# Altium PCB PCB2.PcbDoc
Units mil, origin at the board's own origin, x right, y up, seen from the top; angles counter-clockwise.
Board outline 6155 x 4050 mil, 2 copper layers (Top Layer, Bottom Layer); 71 components, 65 nets, 207 pads, 52 vias.
Unrouted connection lines stored in the file: 1.
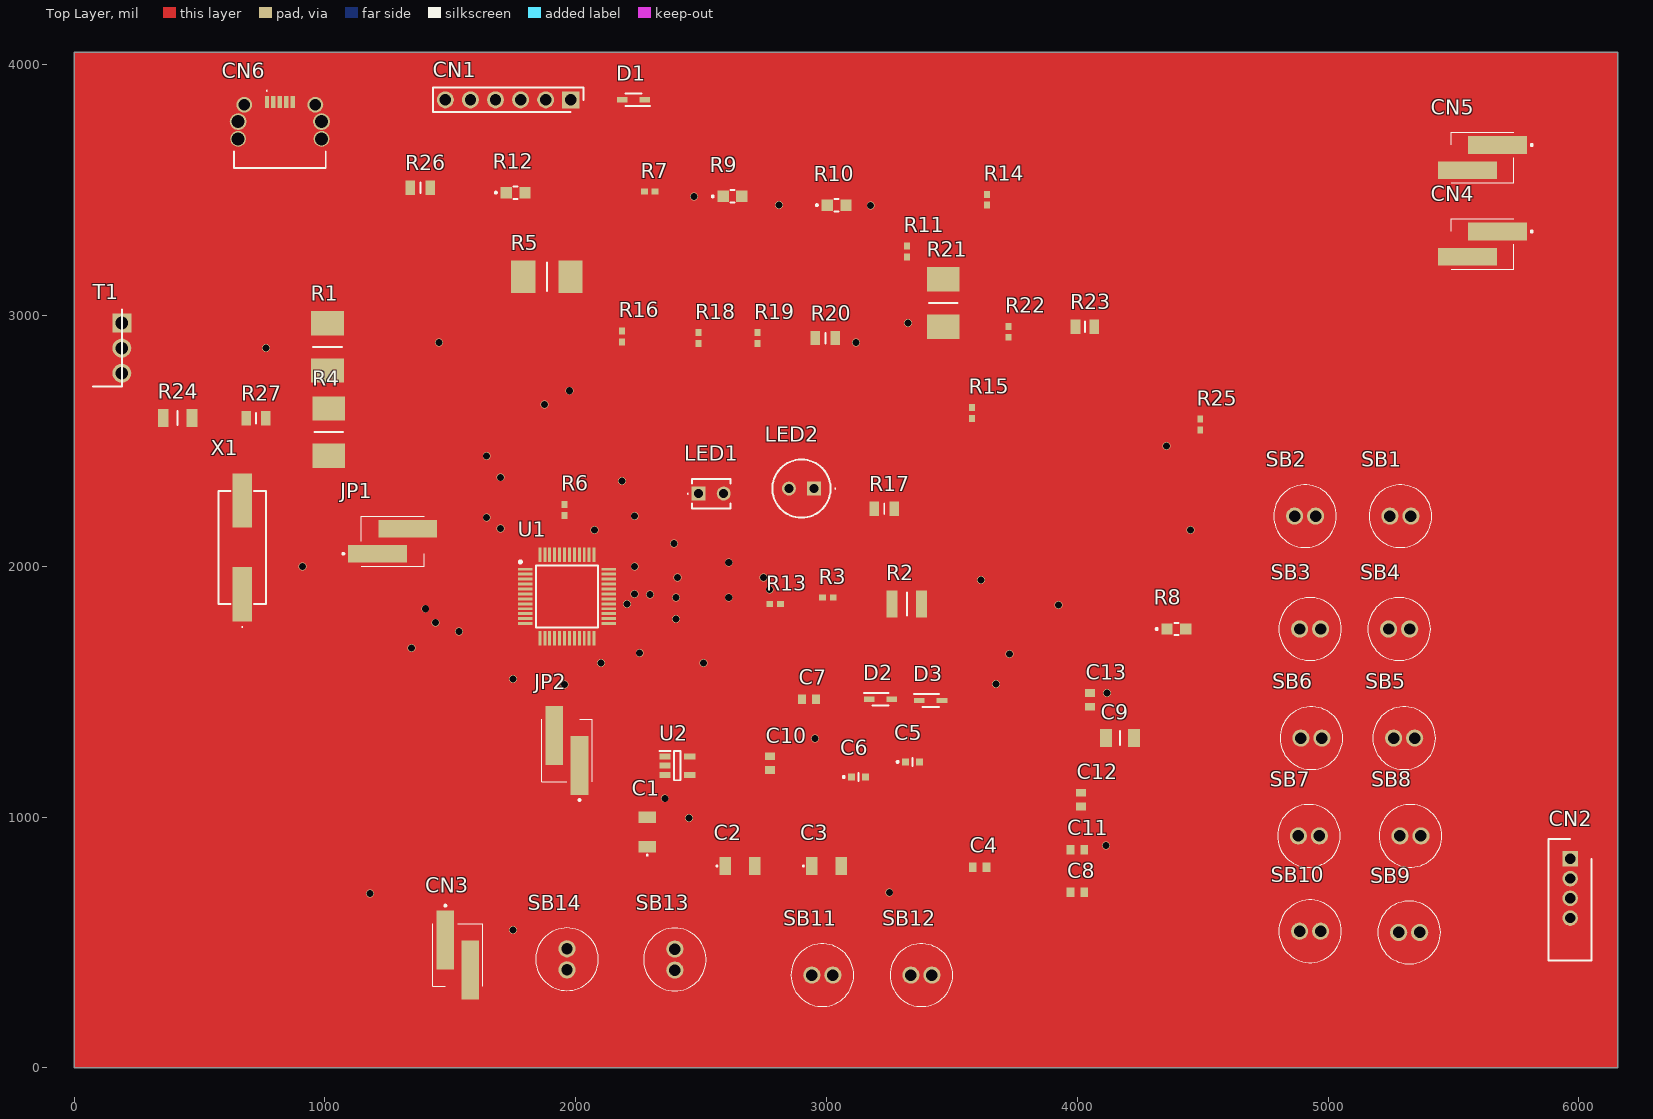
[diagram p0: Top Layer view]
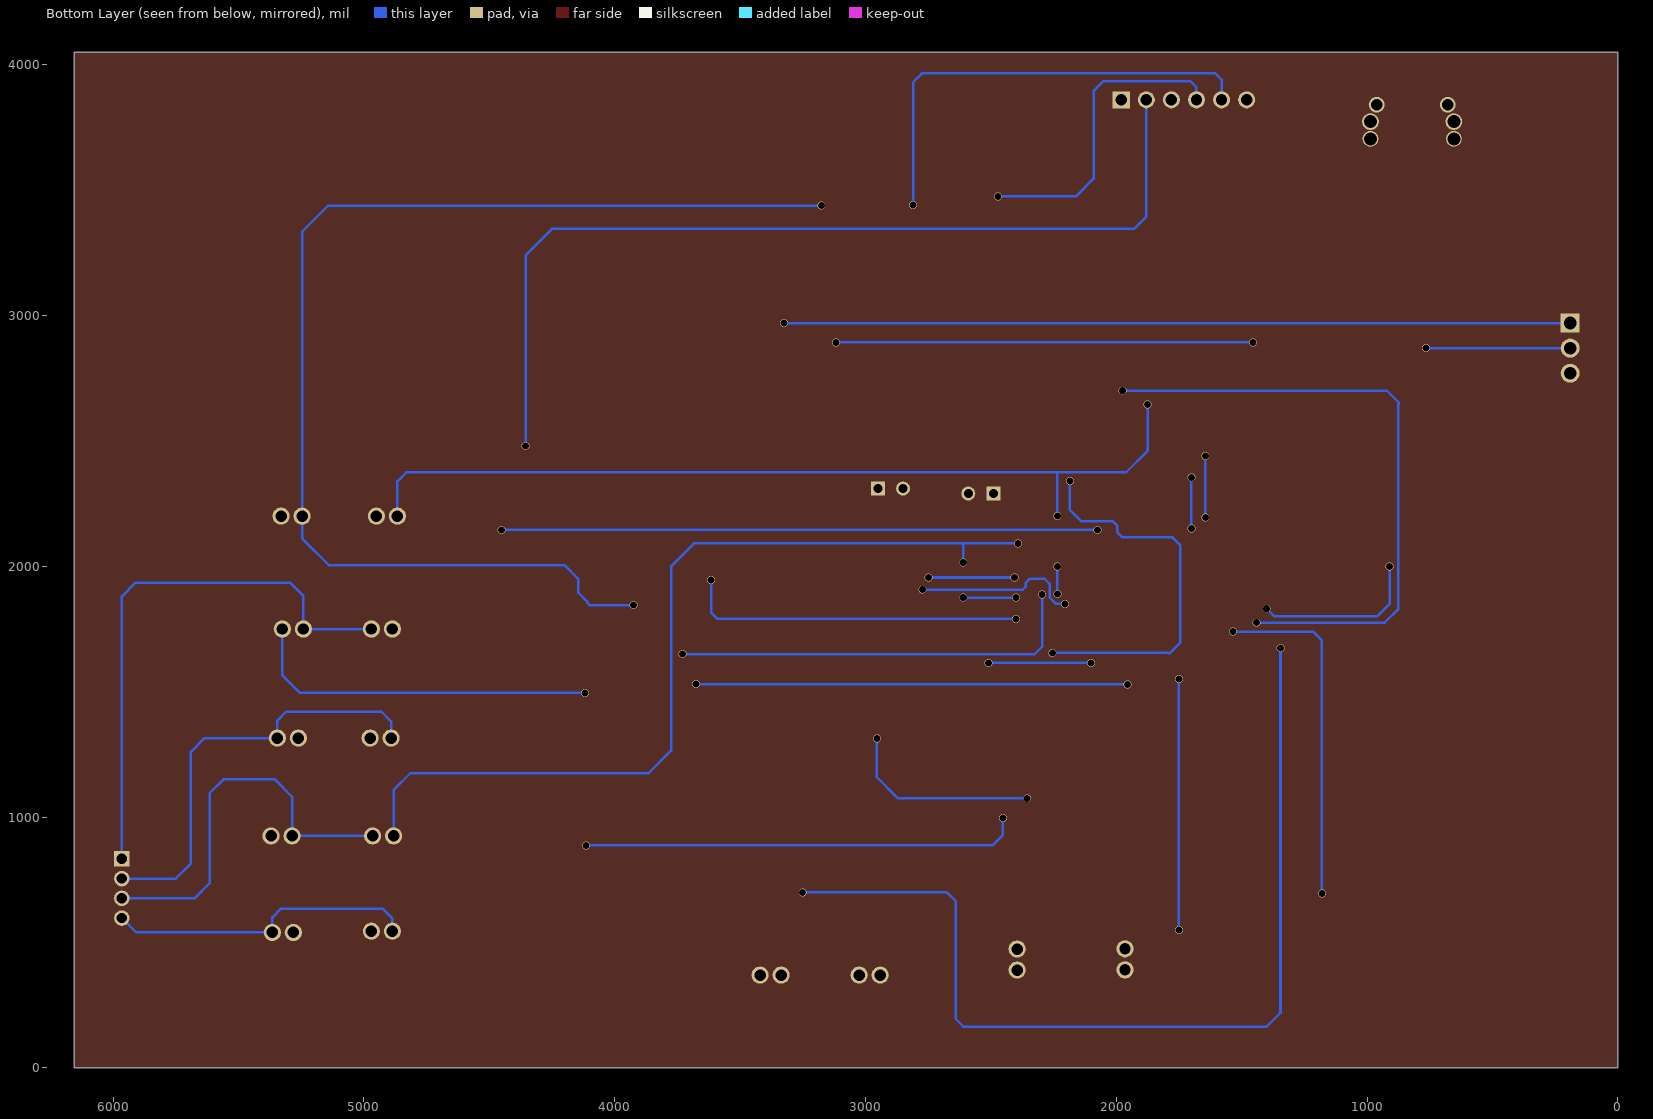
[diagram p1: Bottom Layer view, seen from below]
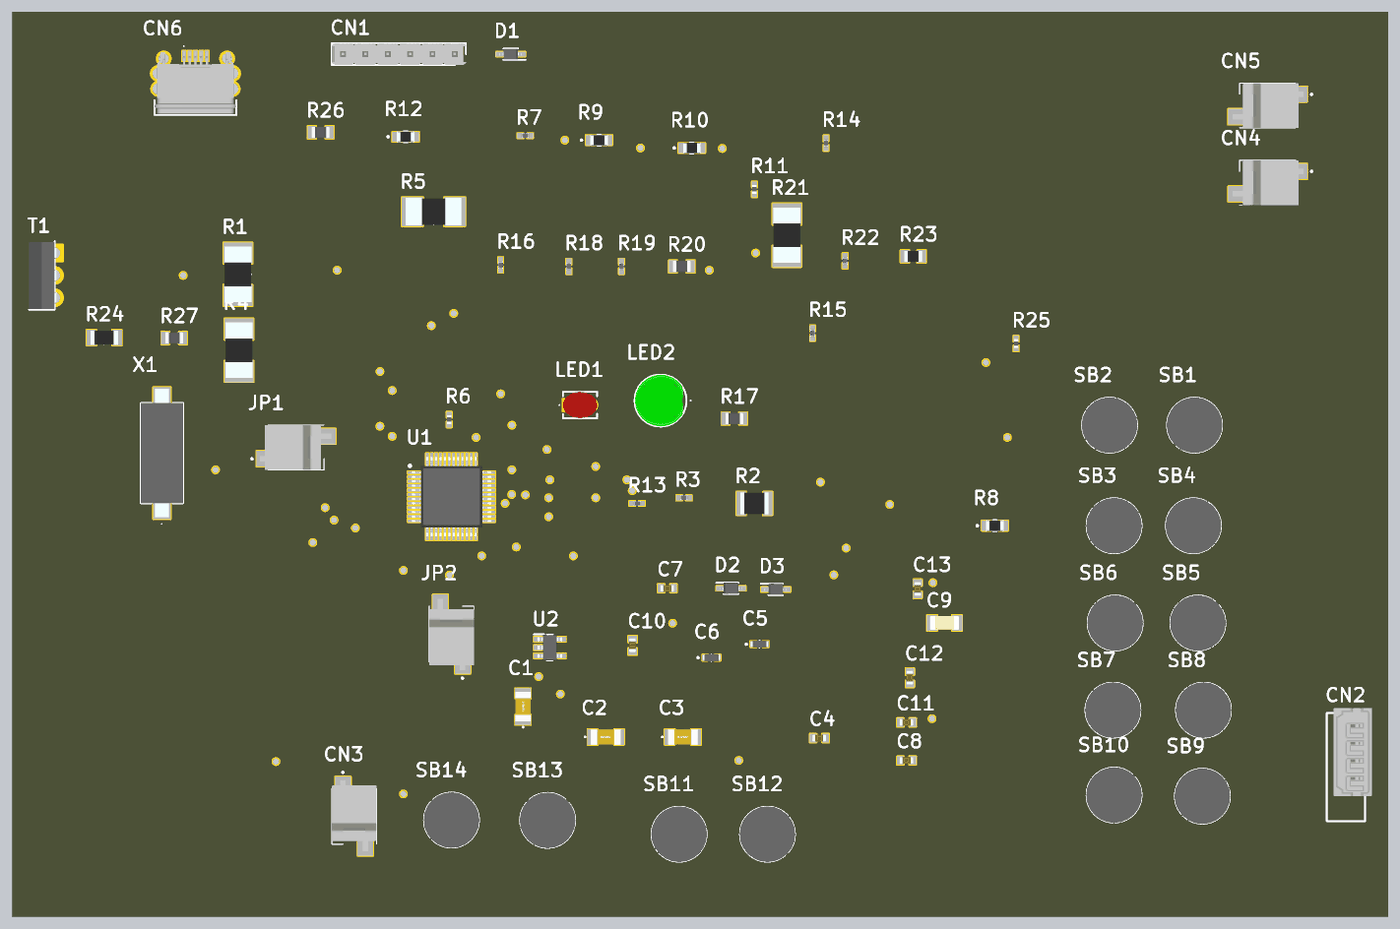
[diagram p2: 3D render of the assembled board from above, using the file's embedded part models]

## Layer stack, top to bottom
Top Solder: solder mask 0.4, Solder Resist, Dk 3.5
Top Layer: signal copper 1.4
Dielectric 1: dielectric 12.6, FR-4, Dk 4.8
Bottom Layer: signal copper 1.4
Bottom Solder: solder mask 0.4, Solder Resist, Dk 3.5

## Board outline
0,0 0,4050 6155,4050 6155,0

## Design rules (kind name [scope] priority, off if disabled: settings)
Clearance [All] p1: gap=10 ignorepadtopadclearanceinfootprint=FALSE
PolygonConnect [All] p1: connectstyle=Relief reliefconductorwidth=10 reliefentries=4 polygonreliefangle="90 Angle" airgapwidth=10
RoutingVias [All] p1: holewidth=28 width=50 viastyle="Through Hole" minholewidth=28 minwidth=50 maxholewidth=28 maxwidth=50
SolderMaskExpansion [All] p1: expansion=4 istentingtop=FALSE
Width [All] p1: maxlimit=10 minlimit=10 preferedwidth=10
30 further rules are at their usual default settings.

## Components (designator, comment, footprint, x,y, rotation, side; value= is the part's Value field where it differs from the comment)
C1 "20pF" C1206 2285,940.94 r90 top
C2 "20pF" C1206 2655,805 r0 top
C3 "20pF" C1206 3000,805 r0 top
C4 "100nF" CAPC1608X90N 3610,800 r0 top
C5 "1uF_X5R_0603" MAJx16 3342.56,1220 r0 top
C6 "1uF_X5R_0603" MAJx16 3127.56,1160 r0 top
C7 "100nF" CAPC1608X90N 2930,1470 r0 top
C8 "100nF" CAPC1608X90N 4000,700 r0 top
C9 "10nF_X7R_0603" CAPC3316X145N 4170,1315 r0 top
C10 "100nF" CAPC1608X90N 2775,1215 r90 top
C11 "100nF" CAPC1608X90N 4000,870 r0 top
C12 "100nF" CAPC1608X90N 4015,1070 r90 top
C13 "100nF" CAPC1608X90N 4050,1467.56 r90 top
CN1 "Header 6x1" HDRV6W66P0X254_1X6_1524X249X838P 1980,3860 r180 top
CN2 "53014-0410" SHDR4W60P0X200_1X4_1200X435X1000P 5965,833.74 r90 top
CN3 "3-647166-2" 36471662 1530,450.16 r180 top
CN4 "3-647166-2" 36471662 5614.84,3285 r90 top
CN5 "3-647166-2" 36471662 5614.84,3630 r90 top
CN6 "204926-1103" 2049261103 820,3725 r0 top
D1 "BAT60JFILM" SOD2513X117N 2230,3860 r180 top
D2 "BAT60JFILM" SOD2513X117N 3215,1470 r0 top
D3 "BAT60JFILM" SOD2513X117N 3415,1465 r0 top
JP1 "3-647166-2" 36471662 1270.16,2100 r270 top
JP2 "3-647166-2" 36471662 1965,1265.16 r0 top
LED1 "Red" C4SMARGYCS4V1BB1 2490,2290 r0 top
LED2 "Green" TLHG5420ASZ 2950,2310 r0 top
R1 "10K" RESC6331X80N 1010,2875 r270 top
R2 "2K7" RESC3225X70N 3320,1850 r0 top
R3 "4K7" RESC1005X37N 3005,1875 r0 top
R4 "10K" RESC6331X80N 1015,2535 r270 top
R5 "10K" RESC6331X80N 1885,3155 r180 top
R6 "100K" RESC1005X40N 1955,2225 r270 top
R7 "100" RESC1005X37N 2295,3495 r0 top
R8 "22" ERA6AEB1020V 4395,1750 r0 top
R9 "22" ERA6AEB1020V 2625,3475 r0 top
R10 "22" ERA6AEB1020V 3040,3440 r0 top
R11 "100K" RESC1005X40N 3320,3255 r90 top
R12 "22" ERA6AEB1020V 1760,3490 r0 top
R13 "100 [N/A]" RESC1005X37N 2795,1850 r0 top
R14 "4K7" RESC1005X37N 3640,3461.65 r90 top
R15 "4K7" RESC1005X37N 3580,2611.65 r90 top
R16 "100" RESC1005X37N 2185,2916.65 r90 top
R17 "0" RESC2013X84N 3230,2230 r0 top
R18 "100" RESC1005X37N 2490,2910 r90 top
R19 "100" RESC1005X37N 2725,2910 r90 top
R20 "0" RESC2013X84N 2995,2910 r0 top
R21 "10K" RESC6331X80N 3465,3050 r90 top
R22 "100" RESC1005X37N 3725,2935 r90 top
R23 "36K" RESC2012X55N 4030,2955 r180 top
R24 "1K5" RESC3116X65N 412.25,2591.32 r180 top
R25 "100K" RESC1005X40N 4490,2565 r90 top
R26 "0" RESC2013X84N 1380,3510 r0 top
R27 "0" RESC2013X84N 725,2590 r0 top
SB1 "8631CQD2" 8631CQD2 5246.14,2200 r0 top
SB2 "8631CQD2" 8631CQD2 4866.14,2200 r0 top
SB3 "8631CQD2" 8631CQD2 4886.14,1750 r0 top
SB4 "8631CQD2" 8631CQD2 5241.14,1750 r0 top
SB5 "8631CQD2" 8631CQD2 5261.14,1315 r0 top
SB6 "8631CQD2" 8631CQD2 4891.14,1315 r0 top
SB7 "8631CQD2" 8631CQD2 4881.14,925 r0 top
SB8 "8631CQD2" 8631CQD2 5286.14,925 r0 top
SB9 "8631CQD2" 8631CQD2 5281.14,540 r0 top
SB10 "8631CQD2" 8631CQD2 4886.14,545 r0 top
SB11 "8631CQD2" 8631CQD2 2941.14,370 r0 top
SB12 "8631CQD2" 8631CQD2 3336.14,370 r0 top
SB13 "8631CQD2" 8631CQD2 2395,390 r90 top
SB14 "8631CQD2" 8631CQD2 1965,475 r270 top
T1 "9013" TO254P290X760X1320-3P 190,2970 r270 top
U1 "STM32F103CBT6" QFP50P900X900X160-48N 1965,1880 r0 top
U2 "LD3985M33R" SOT95P280X145-5N 2405,1205 r0 top
X1 "8MHz(12pF)" ECS80125PXGMTR 670,2075 r90 top

## Footprints (in the part's own frame and the unit in brackets; to place one, negate y for a bottom-side part, rotate by r counter-clockwise, add the part's x,y. Pads: shape width x height; smd on the part's side, far side on the other; paste and mask are expansions set on the pad)
8631CQD2 [mm]
  round 1.74 hole 1.16: 1(0,0) 2(2.13,0)
  silkscreen extent -2.11,-3.17 4.24,3.17, body extent -2.11,-3.17 4.24,3.17, height 14.03
36471662 [mm]
  rect 1.78x5.97 smd: 1(1.27,-1.52) 2(-1.27,1.52)
  silkscreen extent -2.54,-5.1 2.54,3.18, body extent -2.54,-4.08 2.54,4, height 10.55
2049261103 [mm]
  rect 0.45x1.2 smd: 1(-1.3,3.225) 2(-0.65,3.225) 3(0,3.225) 4(0.65,3.225) 5(1.3,3.225)
  round 1.6 hole 1.17: MH1(-3.6,2.925) MH2(3.6,2.925)
  round 1.7 hole 1.3: MH3(-4.225,1.225) MH4(4.225,1.225)
  round 1.6 hole 1.3: MH5(-4.225,-0.525) MH6(4.225,-0.525)
  silkscreen extent -4.65,-3.47 4.65,4.4, body extent -4.65,-3.32 4.65,3.68, height 3.83
C4SMARGYCS4V1BB1 [mm]
  rect 1.416x1.416 hole 0.91: 1(0,0)
  round 1.416 hole 0.91: 2(2.54,0)
  silkscreen extent -1.13,-1.5 3.22,1.5, body extent -0.68,-1.5 3.22,1.5, height 10.14
C1206 [mm]
  rect 1.15x1.8 smd: 1(-1.5,0) 2(1.5,0)
  silkscreen extent -2.4,-0.05 -2.3,0.05, body extent -1.7,-0.9 1.7,0.9, height 1.75
CAPC1608X90N [mm]
  rect 0.78x0.99 smd: 1(-0.7,0) 2(0.7,0)
  body extent -0.8,-0.41 0.8,0.41, height 0.9
CAPC3316X145N [mm]
  rect 1.17x1.82 smd: 1(-1.42,0) 2(1.42,0)
  silkscreen extent 0,-0.7 0,0.7, body extent -1.65,-0.8 1.65,0.8, height 1.68
ECS80125PXGMTR [mm]
  rect 5.5x2 smd: 1(-4.75,0) 2(4.75,0)
  silkscreen extent -8.1,-2.4 5.7,2.4, body extent -7.3,-2.4 7.3,2.4, height 4.4
ERA6AEB1020V [mm]
  rect 1.15x1.15 smd: 1(-0.95,0) 2(0.95,0)
  silkscreen extent -2.1,-0.62 0.2,0.62, body extent -1,-0.63 1,0.63, height 0.5
HDRV6W66P0X254_1X6_1524X249X838P [mm]
  rect 1.725x1.725 hole 1.15: 1(0,0)
  round 1.725 hole 1.15: 2(2.54,0) 3(5.08,0) 4(7.62,0) 5(10.16,0) 6(12.7,0)
  silkscreen extent -1.27,-1.25 13.97,1.25, body extent -1.27,-1.24 13.97,1.24, height 9.65
MAJx16 [mm]
  rect 0.7x0.7 smd: 1(-0.7,0) 2(0.7,0)
  silkscreen extent -1.6,-0.4 0,0.4, body extent -0.98,-0.4 0.98,0.4, height 0.9
QFP50P900X900X160-48N [mm]
  rect 1.475x0.3 smd: 1(-4.238,2.75) 2(-4.238,2.25) 3(-4.238,1.75) 4(-4.238,1.25) 5(-4.238,0.75) 6(-4.238,0.25) 7(-4.238,-0.25) 8(-4.238,-0.75) 9(-4.238,-1.25) 10(-4.238,-1.75) 11(-4.238,-2.25) 12(-4.238,-2.75) 25(4.238,-2.75) 26(4.238,-2.25) 27(4.238,-1.75) 28(4.238,-1.25) 29(4.238,-0.75) 30(4.238,-0.25) 31(4.238,0.25) 32(4.238,0.75) 33(4.238,1.25) 34(4.238,1.75) 35(4.238,2.25) 36(4.238,2.75)
  rect 0.3x1.475 smd: 13(-2.75,-4.238) 14(-2.25,-4.238) 15(-1.75,-4.238) 16(-1.25,-4.238) 17(-0.75,-4.238) 18(-0.25,-4.238) 19(0.25,-4.238) 20(0.75,-4.238) 21(1.25,-4.238) 22(1.75,-4.238) 23(2.25,-4.238) 24(2.75,-4.238) 37(2.75,4.238) 38(2.25,4.238) 39(1.75,4.238) 40(1.25,4.238) 41(0.75,4.238) 42(0.25,4.238) 43(-0.25,4.238) 44(-0.75,4.238) 45(-1.25,4.238) 46(-1.75,4.238) 47(-2.25,4.238) 48(-2.75,4.238)
  silkscreen extent -4.85,-3.15 3.15,3.62, body extent -4.5,-4.5 4.5,4.5, height 1.6
RESC1005X37N [mm]
  rect 0.7x0.6 smd: 1(-0.55,0) 2(0.55,0)
  body extent -0.5,-0.25 0.5,0.25, height 0.32
RESC1005X40N [mm]
  rect 0.7x0.6 smd: 1(-0.55,0) 2(0.55,0)
  body extent -0.5,-0.25 0.5,0.25, height 0.4
RESC2012X55N [mm]
  rect 1x1.45 smd: 1(-0.95,0) 2(0.95,0)
  silkscreen extent 0,-0.53 0,0.53, body extent -1,-0.63 1,0.63, height 0.55
RESC2013X84N [mm]
  rect 0.95x1.45 smd: 1(-1,0) 2(1,0)
  silkscreen extent 0,-0.53 0,0.54, body extent -1.01,-0.64 1.01,0.64, height 0.36
RESC3116X65N [mm]
  rect 1.1x1.8 smd: 1(-1.45,0) 2(1.45,0)
  silkscreen extent 0,-0.7 0,0.7, body extent -1.55,-0.8 1.55,0.8, height 0.65
RESC3225X70N [mm]
  rect 1.1x2.7 smd: 1(-1.5,0) 2(1.5,0)
  silkscreen extent 0,-1.15 0,1.15, body extent -1.6,-1.25 1.6,1.25, height 0.7
RESC6331X80N [mm]
  rect 2.45x3.3 smd: 1(-2.4,0) 2(2.4,0)
  silkscreen extent 0,-1.45 0,1.45, body extent -3.15,-1.55 3.15,1.55, height 0.8
SHDR4W60P0X200_1X4_1200X435X1000P [mm]
  rect 1.575x1.575 hole 1.05: 1(0,0)
  round 1.575 hole 1.05: 2(-2,0) 3(-4,0) 4(-6,0)
  silkscreen extent -10.3,-2.18 2,2.18, body extent -7.45,-2.96 2.55,1.39, height 5.85
SOD2513X117N [mm]
  rect 1.085x0.55 smd: 1(-1.14,0) 2(1.14,0)
  silkscreen extent -1.68,-0.64 0.83,0.64, body extent -1.25,-0.64 1.25,0.64, height 1.17
SOT95P280X145-5N [mm]
  rect 1.15x0.6 smd: 1(-1.25,0.95) 2(-1.25,0) 3(-1.25,-0.95) 4(1.25,-0.95) 5(1.25,0.95)
  silkscreen extent -1.82,-1.47 0.33,1.5, body extent -1.4,-1.48 1.4,1.48, height 1.45
TLHG5420ASZ [mm]
  rect 1.416x1.416 hole 0.91: 1(0,0)
  round 1.416 hole 0.91: 2(-2.54,0)
  silkscreen extent -4.22,-2.95 2.2,2.95, body extent -4.19,-2.95 1.26,2.95, height 13.24
TO254P290X760X1320-3P [mm]
  rect 1.92x1.92 hole 1.28: 1(0,0)
  round 1.92 hole 1.28: 2(2.54,0) 3(5.08,0)
  silkscreen extent -1.36,-2.9 6.44,0, body extent -1.26,-2.9 6.34,0.26, height 12.92

## Part data
C1 C2 C3: library part C1206C200KCGACTU, "Capacitor", Manufacturer_Name=KEMET, Datasheet Link=https://content.kemet.com/datasheets/KEM_C1009_C0G_HV_SMD.pdf, Manufacturer_Part_Number=C1206C200KCGACTU
C4 C7 C8 C10 C11 C12 C13: library part KAM15AR71H104KM, "Capacitor", Manufacturer_Name="Kyocera AVX", Mouser Part Number=581-KAM15AR71H104KM, Arrow Part Number=KAM15AR71H104KM, Arrow Price/Stock=https://www.arrow.com/en/products/kam15ar71h104km/avx?region=nac, Datasheet Link=https://datasheets.kyocera-avx.com/AutoMLCCKAM.pdf, Height=0.9mm, Manufacturer_Part_Number=KAM15AR71H104KM, Mouser Price/Stock=https://www.mouser.co.uk/ProductDetail/KYOCERA-AVX/KAM15AR71H104KM?qs=Jm2GQyTW%2FbgzS5FHJWrFzQ%3D%3D
C5 C6: library part MAJCT168BB7105KTEA01, "Capacitor", Manufacturer_Name="TAIYO YUDEN", Datasheet Link=https://ds.yuden.co.jp/TYCOMPAS/or/detail?pn=MAJCT168BB7105KTEA01, Height=0.8mm, Manufacturer_Part_Number=MAJCT168BB7105KTEA01
C9: library part KGM31GCG2J103JU, "Capacitor", Manufacturer_Name="Kyocera AVX", Mouser Part Number=581-KGM31GCG2J103JU, Datasheet Link=https://datasheets.kyocera-avx.com/HVKGM.pdf, Height=1.45mm, Manufacturer_Part_Number=KGM31GCG2J103JU, Mouser Price/Stock=https://www.mouser.co.uk/ProductDetail/KYOCERA-AVX/KGM31GCG2J103JU?qs=63Lh8XYXgjt6ivbLeGkCxg%3D%3D
CN1: library part 22-28-4062, "Connector", Manufacturer_Name=Molex, Mouser Part Number=538-22-28-4062, Datasheet Link=https://datasheet.datasheetarchive.com/originals/distributors/SFDatasheet-1/sf-00031037.pdf, Height=8.38mm, Manufacturer_Part_Number=22-28-4062, Mouser Price/Stock=https://www.mouser.com/Search/Refine.aspx?Keyword=538-22-28-4062
CN2: "Connector", Manufacturer_Name=Molex, Mouser Part Number=538-53014-0410, Datasheet Link=https://www.molex.com/pdm_docs/sd/530140410_sd.pdf, Height=10mm, Manufacturer_Part_Number=53014-0410, Mouser Price/Stock=https://www.mouser.co.uk/ProductDetail/Molex/53014-0410?qs=TLs3Kb%252BkMqKk8s1WRHwRGw%3D%3D
CN3 CN4 CN5 JP1 JP2: "Connector", Manufacturer_Name="TE Connectivity", Mouser Part Number=571-3-647166-2, Arrow Part Number=3-647166-2, Arrow Price/Stock=https://www.arrow.com/en/products/3-647166-2/te-connectivity?region=nac, Datasheet Link=https://www.te.com/commerce/DocumentDelivery/DDEController?Action=showdoc&DocId=Customer+Drawing%7F647166%7FR1%7Fpdf%7FEnglish%7FENG_CD_647166_R1.pdf%7F3-647166-2, Height=10.66mm, Manufacturer_Part_Number=3-647166-2, Mouser Price/Stock=https://www.mouser.co.uk/ProductDetail/TE-Connectivity/3-647166-2?qs=xsTFCgGnzbJU1qz6Np9kzA%3D%3D
CN6: "Connector", Manufacturer_Name=Molex, Mouser Part Number=538-204926-1103, Arrow Part Number=204926-1103, Arrow Price/Stock=https://www.arrow.com/en/products/204926-1103/molex?region=nac, Datasheet Link=https://www.molex.com/content/dam/molex/molex-dot-com/products/automated/en-us/salesdrawingpdf/204/204926/2049261103_sd.pdf, Height=4.65mm, Manufacturer_Part_Number=204926-1103, Mouser Price/Stock=https://www.mouser.co.uk/ProductDetail/Molex/204926-1103?qs=55YtniHzbhBOQihiQOeiLg%3D%3D
D1 D2 D3: "Schottky Diode", Manufacturer_Name=STMicroelectronics, Mouser Part Number=511-BAT60JFILM, Arrow Part Number=BAT60JFILM, Arrow Price/Stock=https://www.arrow.com/en/products/bat60jfilm/stmicroelectronics?region=nac, Datasheet Link=https://www.mouser.jp/datasheet/2/389/cd00001944-1795661.pdf, Height=1.17mm, Manufacturer_Part_Number=BAT60JFILM, Mouser Price/Stock=https://www.mouser.co.uk/ProductDetail/STMicroelectronics/BAT60JFILM?qs=GnFZssByvVVVnMaukcyLZg%3D%3D
LED1: library part C4SMA-RGY-CS4V1BB1, "LED", Manufacturer_Name="CREE LED", Mouser Part Number=941-C4SMARGYCS4V1BB1, Arrow Part Number=C4SMA-RGY-CS4V1BB1, Arrow Price/Stock=https://www.arrow.com/en/products/c4sma-rgy-cs4v1bb1/cree-led?region=nac, Datasheet Link=https://cree-led.com/media/documents/C4SMA-1442.pdf, Height=8.8mm, Manufacturer_Part_Number=C4SMA-RGY-CS4V1BB1, Mouser Price/Stock=https://www.mouser.co.uk/ProductDetail/Cree-LED/C4SMA-RGY-CS4V1BB1?qs=7D1LtPJG0i08%2Fw1qRIcnyw%3D%3D
LED2: library part TLHG5420-ASZ, "LED", Manufacturer_Name=Vishay, Mouser Part Number=78-TLHG5420-ASZ, Datasheet Link=https://www.vishay.com/docs/86335/tlhg542_tlhg642.pdf, Height=12.8mm, Manufacturer_Part_Number=TLHG5420-ASZ, Mouser Price/Stock=https://www.mouser.co.uk/ProductDetail/Vishay-Siliconix/TLHG5420-ASZ?qs=M%2FWrVUahkW9Iv5EBNpgqMA%3D%3D
R1 R4 R5 R21: library part CRM2512QJW-103ELF, "Resistor", Manufacturer_Name=Bourns, Mouser Part Number=652-CRM2512QJW-103E, Arrow Part Number=CRM2512QJW-103ELF, Arrow Price/Stock=https://www.arrow.com/en/products/crm2512qjw-103elf/bourns?region=nac, Datasheet Link=http://www.bourns.com/data/global/pdfs/CRM0805_1206_2010.pdf, Height=0.8mm, Manufacturer_Part_Number=CRM2512QJW-103ELF, Mouser Price/Stock=https://www.mouser.co.uk/ProductDetail/Bourns/CRM2512QJW-103ELF?qs=8Wlm6%252BaMh8Rzg3bRHdWGsA%3D%3D
R2: library part CRCW12102K70FKEAHP, "Resistor", Manufacturer_Name=Vishay, Mouser Part Number=71-CRCW12102K70FKEAH, Datasheet Link=http://componentsearchengine.com/Datasheets/1/CRCW12102K70FKEAHP.pdf, Height=0.7mm, Manufacturer_Part_Number=CRCW12102K70FKEAHP, Mouser Price/Stock=https://www.mouser.co.uk/ProductDetail/Vishay-Dale/CRCW12102K70FKEAHP?qs=OAzHGkhREL0m0%252BU1n6AaAg%3D%3D
R3 R14 R15: library part MCS04020D4701BE000, "Resistor", Manufacturer_Name=Vishay, Mouser Part Number=594-MCS04020D4701BE0, Datasheet Link=http://www.vishay.com/docs/28705/mcx0x0xpro.pdf, Height=0.37mm, Manufacturer_Part_Number=MCS04020D4701BE000, Mouser Price/Stock=https://www.mouser.co.uk/ProductDetail/Vishay-Beyschlag/MCS04020D4701BE000?qs=ft9OtscSA3%252BR0DpF5QqL2Q%3D%3D
R6 R11 R25: library part SFR01MZPF1003, "Resistor", Manufacturer_Name="ROHM Semiconductor", Mouser Part Number=755-SFR01MZPF1003, Datasheet Link=https://fscdn.rohm.com/en/products/databook/datasheet/passive/resistor/chip_resistor/sfr-e.pdf, Height=0.4mm, Manufacturer_Part_Number=SFR01MZPF1003, Mouser Price/Stock=https://www.mouser.co.uk/ProductDetail/ROHM-Semiconductor/SFR01MZPF1003?qs=Mv7BduZupUj2RFL5gMaKTg%3D%3D
R7 R13 R16 R18 R19 R22: library part MCS04020C1000FE000, "Resistor", Manufacturer_Name=Vishay, Mouser Part Number=594-MCS04020C1000FE0, Arrow Part Number=MCS04020C1000FE000, Arrow Price/Stock=https://www.arrow.com/en/products/mcs04020c1000fe000/vishay, Datasheet Link=http://www.vishay.com/docs/28705/mcx0x0xpro.pdf, Height=0.37mm, Manufacturer_Part_Number=MCS04020C1000FE000, Mouser Price/Stock=https://www.mouser.co.uk/ProductDetail/Vishay-Beyschlag/MCS04020C1000FE000?qs=7ZE6F4QMOBYkwvQlfbkT8w%3D%3D
R8 R9 R10 R12: library part ERA-6AHD220V, "Resistor", Manufacturer_Name=Panasonic, Mouser Part Number=667-ERA-6AHD220V, Datasheet Link=https://industrial.panasonic.com/cdbs/www-data/pdf/RDM0000/AOA0000C307.pdf, Height=0.6mm, Manufacturer_Part_Number=ERA-6AHD220V, Mouser Price/Stock=https://www.mouser.co.uk/ProductDetail/Panasonic/ERA-6AHD220V/?qs=MNPzkKEzRtQTWqg2JSKn2A%3D%3D
R17 R20 R26 R27: library part WSL080500000ZEA9, "Resistor", Manufacturer_Name=Vishay, Mouser Part Number=71-WSL080500000ZEA9, Arrow Part Number=WSL080500000ZEA9, Arrow Price/Stock=https://www.arrow.com/en/products/wsl080500000zea9/vishay?region=nac, Datasheet Link=https://ad.componentsearchengine.com/Datasheets/2/WSL080500000ZEA9.pdf, Height=0.838mm, Manufacturer_Part_Number=WSL080500000ZEA9, Mouser Price/Stock=https://www.mouser.co.uk/ProductDetail/Vishay-Dale/WSL080500000ZEA9?qs=f1l5vAGoKgsImKS87N8TmQ%3D%3D
R23: library part TNPW080536K0BEEA, "Resistor", Manufacturer_Name=Vishay, Datasheet Link=https://www.vishay.com/docs/31006/tnpw.pdf, Height=0.55mm, Manufacturer_Part_Number=TNPW080536K0BEEA
R24: library part CRCW12061K50FKEAHP, "Resistor", Manufacturer_Name=Vishay, Mouser Part Number=71-CRCW12061K50FKEAH, Arrow Part Number=CRCW12061K50FKEAHP, Arrow Price/Stock=https://www.arrow.com/en/products/crcw12061k50fkeahp/vishay?region=nac, Datasheet Link=http://componentsearchengine.com/Datasheets/1/CRCW12061K50FKEAHP.pdf, Height=0.65mm, Manufacturer_Part_Number=CRCW12061K50FKEAHP, Mouser Price/Stock=https://www.mouser.co.uk/ProductDetail/Vishay-Dale/CRCW12061K50FKEAHP?qs=k2%2FDWSARqgEwHXAQbL4aEg%3D%3D
SB1 SB2 SB3 SB4 SB5 SB6 SB7 SB8 SB9 SB10 SB11 SB12 SB13 SB14: "Switch (2-Pin Push)", Manufacturer_Name="C & K COMPONENTS", Mouser Part Number=611-8631-261, Datasheet Link=https://www.ckswitches.com/media/1396/8600.pdf, Height=13.93mm, Manufacturer_Part_Number=8631CQD2, Mouser Price/Stock=https://www.mouser.co.uk/ProductDetail/CK/8631CQD2?qs=ktcBc77oICXe9iPhfEwnkA%3D%3D
T1: library part BD139, "Transistor BJT NPN", Manufacturer_Name=STMicroelectronics, Mouser Part Number=511-BD139, Arrow Part Number=BD139, Arrow Price/Stock=https://www.arrow.com/en/products/bd139/stmicroelectronics?region=europe, Datasheet Link=http://www.st.com/web/en/resource/technical/document/datasheet/CD00001225.pdf, Height=2.9mm, Manufacturer_Part_Number=BD139, Mouser Price/Stock=https://www.mouser.co.uk/ProductDetail/STMicroelectronics/BD139?qs=ljbEvF4DwOPW%2FLxHSWYMMA%3D%3D
U1: "Integrated Circuit", Manufacturer_Name=STMicroelectronics, Mouser Part Number=511-STM32F103CBT6, Arrow Part Number=STM32F103CBT6, Arrow Price/Stock=https://www.arrow.com/en/products/stm32f103cbt6/stmicroelectronics?region=europe, Datasheet Link=http://www.st.com/st-web-ui/static/active/en/resource/technical/document/datasheet/CD00161566.pdf, Height=1.6mm, Manufacturer_Part_Number=STM32F103CBT6, Mouser Price/Stock=https://www.mouser.co.uk/ProductDetail/STMicroelectronics/STM32F103CBT6?qs=WxFF5lh7QM3goh6GV5Ogig%3D%3D
U2: "Integrated Circuit", Manufacturer_Name=STMicroelectronics, Mouser Part Number=511-LD3985M33R, Arrow Part Number=LD3985M33R, Arrow Price/Stock=https://www.arrow.com/en/products/ld3985m33r/stmicroelectronics?region=europe, Datasheet Link=http://www.st.com/st-web-ui/static/active/en/resource/technical/document/datasheet/CD00003395.pdf, Height=1.45mm, Manufacturer_Part_Number=LD3985M33R, Mouser Price/Stock=https://www.mouser.co.uk/ProductDetail/STMicroelectronics/LD3985M33R?qs=22WmWNTp1rrPOccVv4HZ7A%3D%3D
X1: library part ECS-80-12-5PX-GM-TR, "Crystal or Oscillator", Manufacturer_Name=ECS, Mouser Part Number=520-80-12-5PX-GM-TR, Datasheet Link=https://ecsxtal.com/store/pdf/csm-7x.pdf, Height=4.3mm, Manufacturer_Part_Number=ECS-80-12-5PX-GM-TR, Mouser Price/Stock=https://www.mouser.co.uk/ProductDetail/ECS/ECS-80-12-5PX-GM-TR?qs=amGC7iS6iy%252BwzUdIY7WpOA%3D%3D

## Via types
v1: diameter 31.5, hole 28, Top Layer to Bottom Layer, 52 vias

## Nets (pads, with @x,y where several pads share a name; then routed paths per layer and width w, separated by ;. In a path a pad name is that pad's centre, name@x,y a point inside that pad or via, vN(x,y) a via of type N, cw(c..) or ccw(c..) an arc to the next point about the centre after c; other vN are vias at no path point)
+3V3: R14.1
+3V3_ST_LINK: C6.2 C8.2 C10.2 C11.2 C12.2 C13.2 JP1.1 R11.2 R17.2 R20.2 SB4.2 T1.2 U1.1 U1.9 U1.36 U1.48 U2.5 | length 15447.5
  Top Layer w9.96: v1(1400,1830.79) U1.9 ; U1.1 1798.15,2023.15 1820,2045 1856.73,2045 1856.73,1993.27 ; 1997.24,1989.49 U1.36@2125,1989.49
  Top Layer w10: v1(765,2870) 845,2870 910,2805 910,2295 ; v1(910,2000) 910,2050 ; JP1.1 910,2050 ; 1856.73,1993.27 1885,1965 1972.76,1965 1997.24,1989.49 ; U1.48@1856.73,2045 U1.48 ; C10.2 2774.84,1242.4 2705,1242.4 ; C6.2 3155.12,1100 ; R11.2 3086.65,3276.65 3034.37,3224.37 R20.2 3034.37,2645.63 3095,2585 3197,2585 3269.37,2512.63 R17.2 3269.37,2115.63 3268.48,2114.74 ; C12.2 3912.56,1097.56 3910,1095 ; v1(4118,1495.12) C13.2 3945.12,1495.12 3910,1460 3910,1095 ; 910,2050 910,2295 ; 910,2295 912,2297 2268,2297 2310,2255 2310,2085 2345,2050 2425,2050 2454.21,2020.79 U2.5 2705,1242.4 ; 2705,1242.4 2703.76,1243.64 2703.76,2073.76 2744.74,2114.74 3268.48,2114.74 ; 3155.12,1100 3155.12,269.88 3215,210 3990,210 4027.56,247.56 C8.2 C11.2 4027.56,922.56 3990.12,960 3935,960 3910,985 3910,1095 ; 3155.12,1100 3157.24,1097.88 3370,1097.88 3421,1148.88 3421,2079 3385.26,2114.74 3268.48,2114.74
  Bottom Layer w10: T1.2 v1(765,2870) ; v1(910,2000) 910,1850 960,1800 1369.21,1800 v1(1400,1830.79) ; v1(4118,1495.12) 5255.12,1495.12 5325,1565 SB4.2
AIN_1: R7.2 R14.2 R15.2 U1.10 | length 7693.3
  Top Layer w9.96: 1621.64,1810.79 U1.10@1798.15,1810.79
  Top Layer w10: v1(1440,1775) 1585.86,1775 1621.64,1810.79 ; v1(1975,2700) 2050,2700 2092.5,2742.5 2092.5,3367.5 2125,3400 2380,3400 2405,3425 2405,3573.71 ; R7.2 2316.65,3546.65 2343.71,3573.71 2405,3573.71 ; R15.2 4103.31,2633.31 4220,2750 4220,3530 4176.29,3573.71 3640,3573.71 ; R14.2 3640,3573.71 ; 2405,3573.71 3640,3573.71
  Bottom Layer w10: v1(1440,1775) 930,1775 875,1830 875,2645 874.14,2645.86 874.14,2654.14 920,2700 v1(1975,2700)
E5V: D2.2 R2.1 | length 380.4
  Top Layer w10: D2.2 3260.94,1471.06 R2.1
GND: C1.2 C2.2 C3.2 C5.1 C6.1 C7.1 C8.1 C9.2 C10.1 C11.1 C12.1 C13.1 CN1.3 CN4.1 CN4.2 CN5.1 CN5.2 CN6.5 CN6.MH1 CN6.MH2 CN6.MH3 CN6.MH4 CN6.MH5 CN6.MH6 JP2.2 LED1.2 R1.1 R3.2 R4.1 R5.2 R6.1 R23.1 R25.1 SB8.2 U1.8 U1.20 U1.23 U1.35 U1.47 U2.2 | length 119.7
  Top Layer w10: CN5.2 CN5.2@5602,3580 ; CN5.1@5602,3680 CN5.1
"LED STLINK": R18.1 R19.1 | length 235
  Top Layer w10: R18.1 R19.1
LED_STLINK: U1.30
MCO: SB11.2
NetC3_1: C3.1 R13.2 SB11.1 | length 1709.5
  Top Layer w10: R13.2 2816.65,805 ; SB11.1 2850,370 2816.65,403.35 2816.65,805 ; C3.1@2941.14,804.8 C3.1 2816.65,805
NetC4_1: C4.1 R15.1 SB12.1 | length 3049.5
  Top Layer w10: SB12.1 3335,368.86 3335,305 3390,250 3670,250 3720,300 3720,910 3685,945 3580,945 ; R15.1 3580,945 ; C4.1 3580,802.44 3580,945
NetC5_2: C5.2 C7.2 D2.1 D3.1 U2.1 U2.3 | length 2054.5
  Top Layer w10: v1(2355,1075) 2355.79,1075.79 U2.3 2330,1167.6 2318,1179.6 2318,1230.4 2330,1242.4 U2.1 ; v1@2957.56,1317.56 v1(2954,1314) 3170,1314 ; C7.2 D2.1 3170.12,1314.12 3170,1314 ; C5.2 3370.12,1310 ; D3.1 3370.12,1310 ; 3170,1314 3366.12,1314 3370.12,1310
  Bottom Layer w10: v1(2355,1075) 2870,1075 2954,1159 v1(2954,1314)
NetC9_1: C9.1 U2.4 | length 2348.9
  Top Layer w10: v1(2452,997) 2452,1167.6 U2.4 ; v1(4114.09,887) C9.1
  Bottom Layer w10: v1(2452,997) 2452,928 2493,887 v1(4114.09,887)
NetCN1_1: CN1.1 D1.2 R5.1 | length 910.3
  Top Layer w10: R5.1 1979.49,3859.49 CN1.1 D1.2
NetCN1_2: CN1.2 R8.1 | length 4495.3
  Top Layer w10: v1(4355,2480) 4355,1752.6 R8.1
  Bottom Layer w10: CN1.2 1880,3395 1930,3345 4250,3345 4355,3240 v1(4355,2480)
NetCN1_4: CN1.4 R9.1 | length 1363
  Top Layer w10: v1(2472,3475) R9.1
  Bottom Layer w10: CN1.4 1680,3910 1705,3935 2050,3935 2090,3895 2090,3545.86 2160.86,3475 v1(2472,3475)
NetCN1_5: CN1.5 R10.1 | length 2002.5
  Top Layer w10: v1(2810,3440) R10.1
  Bottom Layer w10: CN1.5@1580,3875 1580,3940 1605,3965 2775,3965 2810,3930 v1(2810,3440)
NetCN1_6: CN1.6 R12.1 | length 578.9
  Top Layer w10: CN1.6 1480,3755 1510,3725 1695,3725 1722.6,3697.4 R12.1
NetCN2_1: CN2.1 SB3.2 SB4.1 | length 2217.5
  Bottom Layer w10: SB3.2 SB4.1 5241.14,1881.14 5295,1935 5910,1935 5965,1880 CN2.1
NetCN2_2: CN2.2 SB5.2 SB6.1 | length 1733.2
  Bottom Layer w10: SB6.1 4891.14,1381.14 4930,1420 5310,1420 5345,1385 SB5.2 5635,1315 5690,1260 5690,815 5750,755 CN2.2
NetCN2_3: CN2.3 SB7.2 SB8.1 | length 1606.9
  Bottom Layer w10: SB7.2 SB8.1 5286.14,1081.14 5355,1150 5560,1150 5615,1095 5615,736.26 5675,676.26 CN2.3 ; SB8.1@5286.14,899.17 SB8.1@5286.14,915
NetCN2_4: CN2.4 SB9.2 SB10.1 | length 1244.4
  Bottom Layer w10: SB10.1 4886.14,596.14 4925,635 5330,635 5365,600 SB9.2 5907.48,540 CN2.4
NetCN6_2: CN6.2 R26.1 | length 1006.7
  Top Layer w10: CN6.2 794.41,3911.84 822.57,3940 1075,3940 1115,3900 1115,3540 1145,3510 R26.1
NetCN6_3: CN6.3 R24.1 R27.1 | length 2049.5
  Top Layer w10: R24.1 576,2591.32 577.32,2590 R27.1 685.63,3265.63 785,3365 980,3365 1035,3420 1035,3890 1010,3915 845,3915 820,3890 CN6.3
NetCN6_4: CN6.4 R25.2 | length 5449.4
  Top Layer w10: CN6.4 845.59,3810.59 820,3785 770,3785 744,3811 744,3964 775,3995 4430,3995 4490,3935 R25.2
NetD1_1: D1.1 R7.1 | length 365.6
  Top Layer w10: R7.1 2273.35,3858.47 D1.1
NetJP1_2: JP1.2 R2.2 R3.1 U1.39 | length 2821.5
  Top Layer w9.96: U1.39@2035,2046.85 2035,2275
  Top Layer w10: JP1.2 1330,2230 1375,2275 1798.8,2275 1799.23,2275.43 2009.57,2275.43 2010,2275 2035,2275 2245,2275 2285,2235 2285,1990 2319.65,1955.35 v1(2405,1955.35) ; v1@2750,1955 2980,1955 ; R3.1 2983.35,1951.65 2980,1955 ; R2.2 3380,1850.94 3380,1925 3350,1955 2980,1955
  Bottom Layer w10: v1(2405,1955.35) v1(2749.22,1955.35)
NetJP2_1: JP2.1 R17.1 U1.21 | length 2288.6
  Top Layer w10: U1.21 2014.21,1615.12 ; JP2.1 2014.21,1206.1 2014.21,1615.12 ; v1(2100.23,1614.77) 2014.56,1614.77 2014.21,1615.12 ; v1(2510,1614.77) 2510,2200 2530,2220 3190.63,2220 R17.1
  Bottom Layer w10: v1@2100,1615 v1(2100.23,1614.77) v1(2510,1614.77)
NetLED1_1: LED1.1 R18.2 | length 731.4
  Top Layer w10: LED1.1 2487.98,2292.02 2452.98,2292.02 2430,2315 2430,2905 2456.65,2931.65 R18.2
NetLED2_1: LED2.1 R19.2 | length 944.7
  Top Layer w10: R19.2 2726.65,2930 2755,2930 2775,2910 2775,2265 2800,2240 2925,2240 2950,2265 LED2.1
NetLED2_2: LED2.2 R20.1 | length 682.2
  Top Layer w10: LED2.2 2850,2870 2890,2910 R20.1
NetR1_2: R1.2 U1.2 | length 1554.4
  Top Layer w9.96: 1725,1970 U1.2@1798.15,1970
  Top Layer w10: R1.2 1649.49,2780.51 1700,2730 v1(1700,2355) ; v1(1700,2150) 1700,1995 1725,1970
  Bottom Layer w10: v1(1700,2150) v1(1700,2355)
NetR4_2: R4.2 U1.3 | length 1238.7
  Top Layer w9.96: 1706.1,1948.9 U1.3
  Top Layer w10: R4.2 1630.96,2440.51 1631.04,2440.59 1644.41,2440.59 v1(1645,2440) ; v1(1645,2195) 1645,2010 1706.1,1948.9
  Bottom Layer w10: v1(1645,2195) v1(1645,2440)
NetR6_2: R6.2 U1.43 | length 156.6
  Top Layer w10: R6.2 1955.16,2203.19 U1.43
NetR13_1: R13.1 U1.29 | length 798.5
  Top Layer w9.96: U1.29@2131.85,1850 v1(2205,1850)
  Top Layer w10: R13.1 v1(2773.35,1906.65)
  Bottom Layer w10: v1(2205,1850) 2240,1850 2265,1875 2265,1930 2285,1950 2345,1950 2360,1935 2360,1920 2373.35,1906.65 v1(2773.35,1906.65)
NetR21_1: R21.1 R22.2 R23.2 T1.1 | length 4005.8
  Top Layer w10: v1(3325,2970) 3325,2870 3345,2850 3445,2850 3465,2870 R21.1 3466.14,2956.65 R22.2 3990.94,2956.65 R23.2
  Bottom Layer w10: T1.1 v1(3325,2970)
NetR24_2: R24.2 T1.3 | length 318.3
  Top Layer w10: T1.3 190,2635 233.68,2591.32 R24.2
NetSB1_2: SB1.2
NetSB2_2: SB2.2
NetSB5_1: SB5.1
NetSB9_1: SB9.1
NetSB13_1: SB13.1
NetSB14_1: SB14.1
NetU1_28: U1.28
OSC_IN: C2.1 U1.5 X1.2 | length 5171.9
  Top Layer w9.96: 905,1910 U1.5@1798.15,1910
  Top Layer w10: 905,1910 830,1985 830,2215 782.99,2262.01 X1.2 502.01,2262.01 450,2210 450,855 500,805 C2.1
OSC_OUT: C1.1 U1.6 X1.1 | length 3126.5
  Top Layer w9.96: 1360,1889.84 U1.6
  Top Layer w10: X1.1 671.85,1889.84 1265,1889.84 ; 1360,1889.84 1265,1889.84 ; C1.1 2200.83,881.89 2199.94,881 1319,881 1265,935 1265,1889.84
STLINK_RX: CN3.2 SB14.2 U1.13 | length 1792.6
  Top Layer w10: CN3.2 1580.83,391.14 1750,391.14 ; v1(1750,550) 1750,391.14 ; v1(1750,1550) 1820,1550 1856.73,1586.73 U1.13 ; SB14.2 1750,391.14
  Bottom Layer w10: v1(1750,550) v1(1750,1550)
STLINK_TX: CN3.1 SB13.2 U1.12 | length 3247.6
  Top Layer w10: v1(1180,695) 1480,695 ; CN3.1 1480,695 ; v1(1535,1740) 1766.42,1740 U1.12 ; SB13.2 2395,645 2345,695 1480,695
  Bottom Layer w10: v1(1180,695) 1180,1705 1215,1740 v1(1535,1740)
STM_JTCK: SB6.2 U1.37 | length 4007.4
  Top Layer w10: U1.37 2074.13,2047.72 2074.13,2144.13 v1(2075,2145) ; v1(4451.27,2145) 5030,2145 5095,2080 5095,1355 5055,1315 SB6.2
  Bottom Layer w10: v1(2075,2145) v1(4451.27,2145)
STM_JTMS: SB10.2 U1.34 | length 4288.1
  Top Layer w10: U1.34 2261.1,1948.9 2295,1915 2295,1888.66 v1(2295.75,1887.91) ; v1(3730,1650) 4355,1650 4375,1630 4375,590 4520,445 4935,445 4970,480 SB10.2
  Bottom Layer w10: v1(2295.75,1887.91) 2295,1887.16 2295,1680 2325,1650 v1(3730,1650)
STM_RST: C4.2 R11.1 SB12.2 U1.7 | length 9398.8
  Top Layer w9.96: 1391.89,1869.86 U1.7@1798.15,1869.86
  Top Layer w10: v1(1345,1675) 1345,1822.97 1391.89,1869.86 ; v1(3250,700) 3497,700 ; R11.1 4076.65,3233.35 4145,3165 4145,2890 4085,2830 3555,2830 3497,2772 3497,700 ; SB12.2 3580,370 3637.56,427.56 3637.56,700 ; C4.2 3637.56,700 ; 3497,700 3637.56,700
  Bottom Layer w10: v1(1345,1675) 1345.01,219.99 1400,165 2610,165 2640,195 2640,665 2675,700 v1(3250,700)
T_JTCK: R8.2 SB3.1 U1.15 U1.26 | length 3472.9
  Top Layer w9.96: 1916.42,1791.42 U1.26 v1@2400,1791.42
  Top Layer w10: U1.15 1896.1,1771.1 1916.42,1791.42 ; v1(3615,1945) 4225,1945 4260,1910 4260,1715 4290,1685 4415,1685 4432.4,1702.4 R8.2 SB3.1
  Bottom Layer w10: v1@2400,1791.42 3591.42,1791.42 3615,1815 v1(3615,1945)
  other v1: 2400,1790
T_JTDI: U1.17
T_JTDO: U1.16
T_JTMS: R9.2 R16.2 SB7.1 U1.27 | length 6071.4
  Top Layer w9.96: U1.27@2131.85,1811.42 2325,1811.42
  Top Layer w10: R16.2 2390.31,2938.31 2392,2940 ; 2325,1811.42 2350,1836.42 2350,1860 2365,1875 v1(2400,1875) ; v1(2392,2091) 2392,2940 ; v1(2610,1875) v1(2610,2015) ; R9.2 2662.4,3317.4 2635,3290 2425,3290 2392,3257 2392,2940
  Bottom Layer w10: v1(2392,2091) 2610,2091 ; v1(2400,1875) v1(2610,1875) ; v1(2610,2015) 2610,2091 ; SB7.1 4881.14,1108.86 4815,1175 3865,1175 3775,1265 3775,2000 3684,2091 2610,2091
T_NRST: R10.2 SB1.1 U1.18 | length 7360.2
  Top Layer w10: U1.18 1955.16,1529.84 v1(1955.86,1529.14) ; R10.2 3079.4,3438 v1(3176,3438) ; v1(3675,1530) 3675,1825 3695,1845 v1(3925,1845)
  Bottom Layer w10: v1@1955,1530 v1(1955.86,1529.14) 1964.14,1529.14 1965,1530 v1(3675,1530) ; v1(3176,3438) 5142,3438 5246.14,3333.86 SB1.1 5246.14,2111.14 5140,2005 4200,2005 4145,1950 4145,1895 4110,1860 4110,1855 4100,1845 v1(3925,1845)
T_SWDIO_IN: R16.1 U1.25 | length 2324
  Top Layer w9.96: U1.25@2131.85,1771.42 2228.58,1771.42
  Top Layer w10: v1(2185,2340) R16.1 ; 2228.58,1771.42 2255,1745 v1(2255,1655)
  Bottom Layer w10: v1(2185,2340) 2185,2225 2140,2180 2015,2180 1995,2160 1995,2135 1975,2115 1775,2115 1745,2085 1745,1695 1785.86,1654.14 1794.14,1654.14 1795,1655 v1(2255,1655)
T_SWO: R12.2 SB2.1 U1.31 | length 4857.9
  Top Layer w9.96: U1.31@2131.85,1890 v1(2234.25,1890)
  Top Layer w10: R12.2 1845,3490 1875,3460 v1(1875,2645) ; v1(2235,2000) v1(2235,2200)
  Bottom Layer w10: v1(1875,2645) 1875,2460 1960,2375 2235,2375 ; v1(2234.25,1890) 2234.63,1890.37 2234.63,1999.63 v1(2235,2000) ; v1(2235,2200) 2235,2375 ; SB2.1 4866.14,2338.86 4830,2375 2235,2375
U5V: CN6.1 D3.2 R21.2 | length 5833.2
  Top Layer w10: CN6.1 768.82,3938.82 795,3965 1110,3965 1150,3925 1150,3735 1198.64,3686.37 1408.64,3686.37 1454,3641 v1(1454,2893) ; v1(3118,2893) 3118,3108 3154.49,3144.49 3255,3144.49 ; D3.2 3459.88,2525.12 3405,2580 3315,2580 3314.14,2579.14 3310.86,2579.14 3255,2635 3255,3144.49 ; R21.2@3460,3144.49 3255,3144.49
  Bottom Layer w10: v1(1454,2893) v1(3118,2893)
"USB DM": R26.2
"USB DP": R27.2
"USB RENUMn": R22.1
USB_DM: U1.32
USB_DP: U1.33
USB_RENUMn: U1.38
VCC: U1.24
pads on no net: U1.4 U1.11 U1.14 U1.19 U1.22 U1.40 U1.41 U1.42 U1.44 U1.45 U1.46

## Other copper
Top Layer:
  rectangle net GND: 0,0 6155,4050

## Silkscreen, mask and mechanical layers (free items; w line width, h text height)
Mechanical 1:
  the board outline again, w10